# Altium PCB Basestation.PcbDoc
Units mm, origin at the board's own origin, x right, y up, seen from the top; angles counter-clockwise.
Board outline 171.58 x 100 mm, 2 copper layers (Top Layer, Bottom Layer); 74 components, 58 nets, 387 pads, 84 vias.
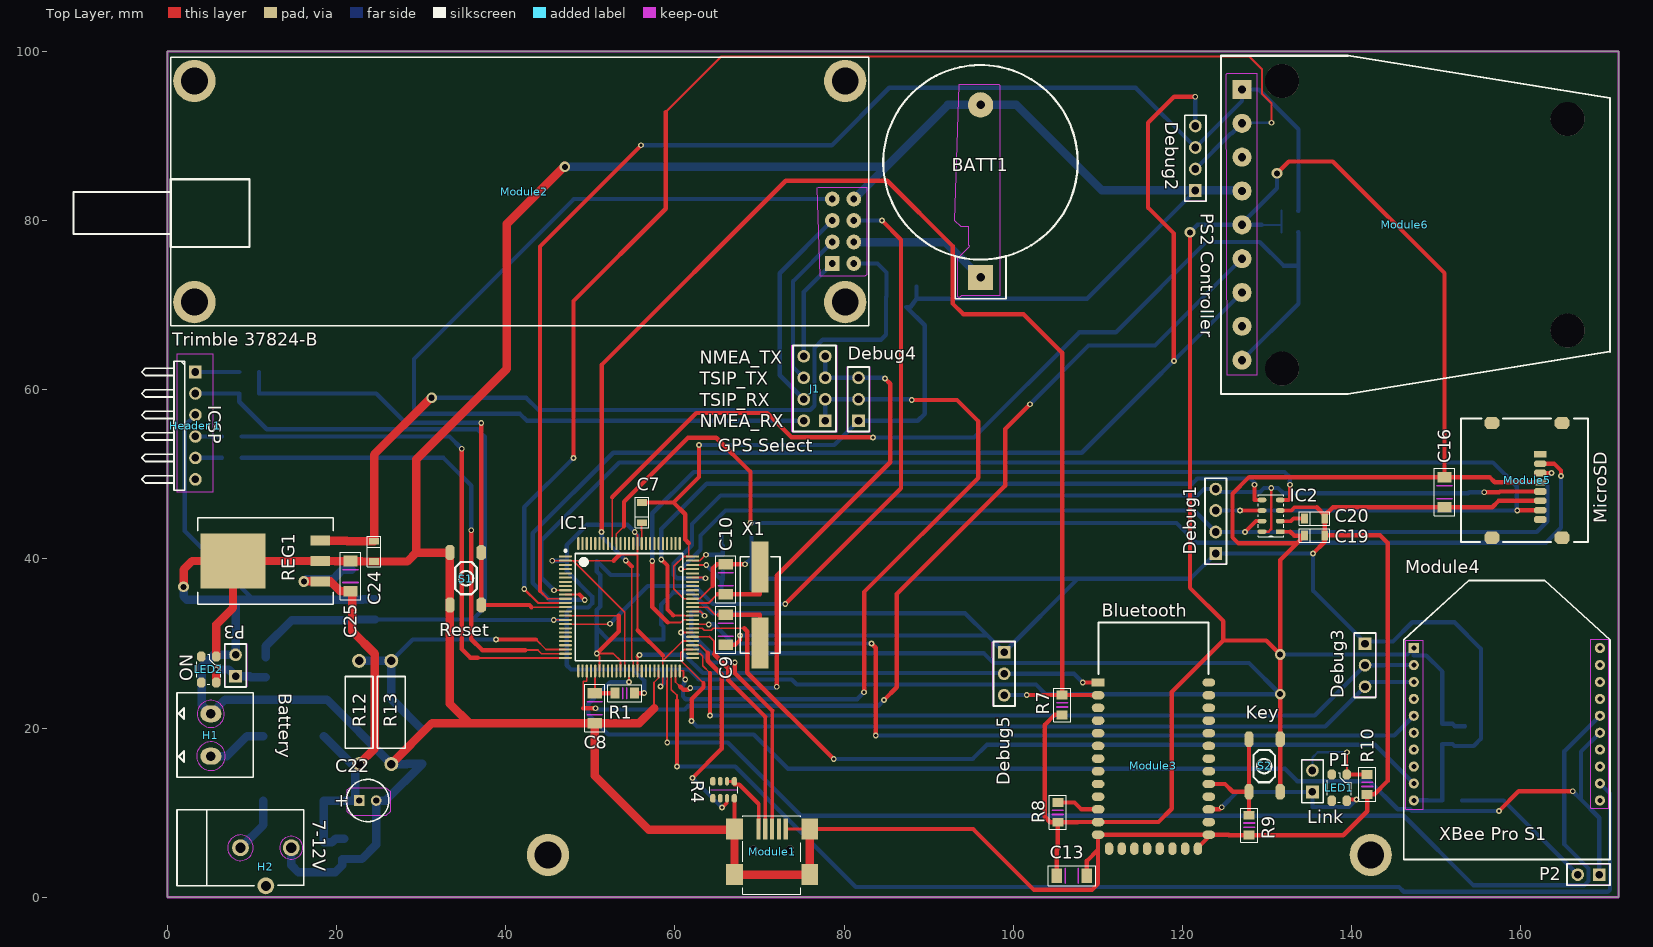
[diagram p0: Top Layer view]
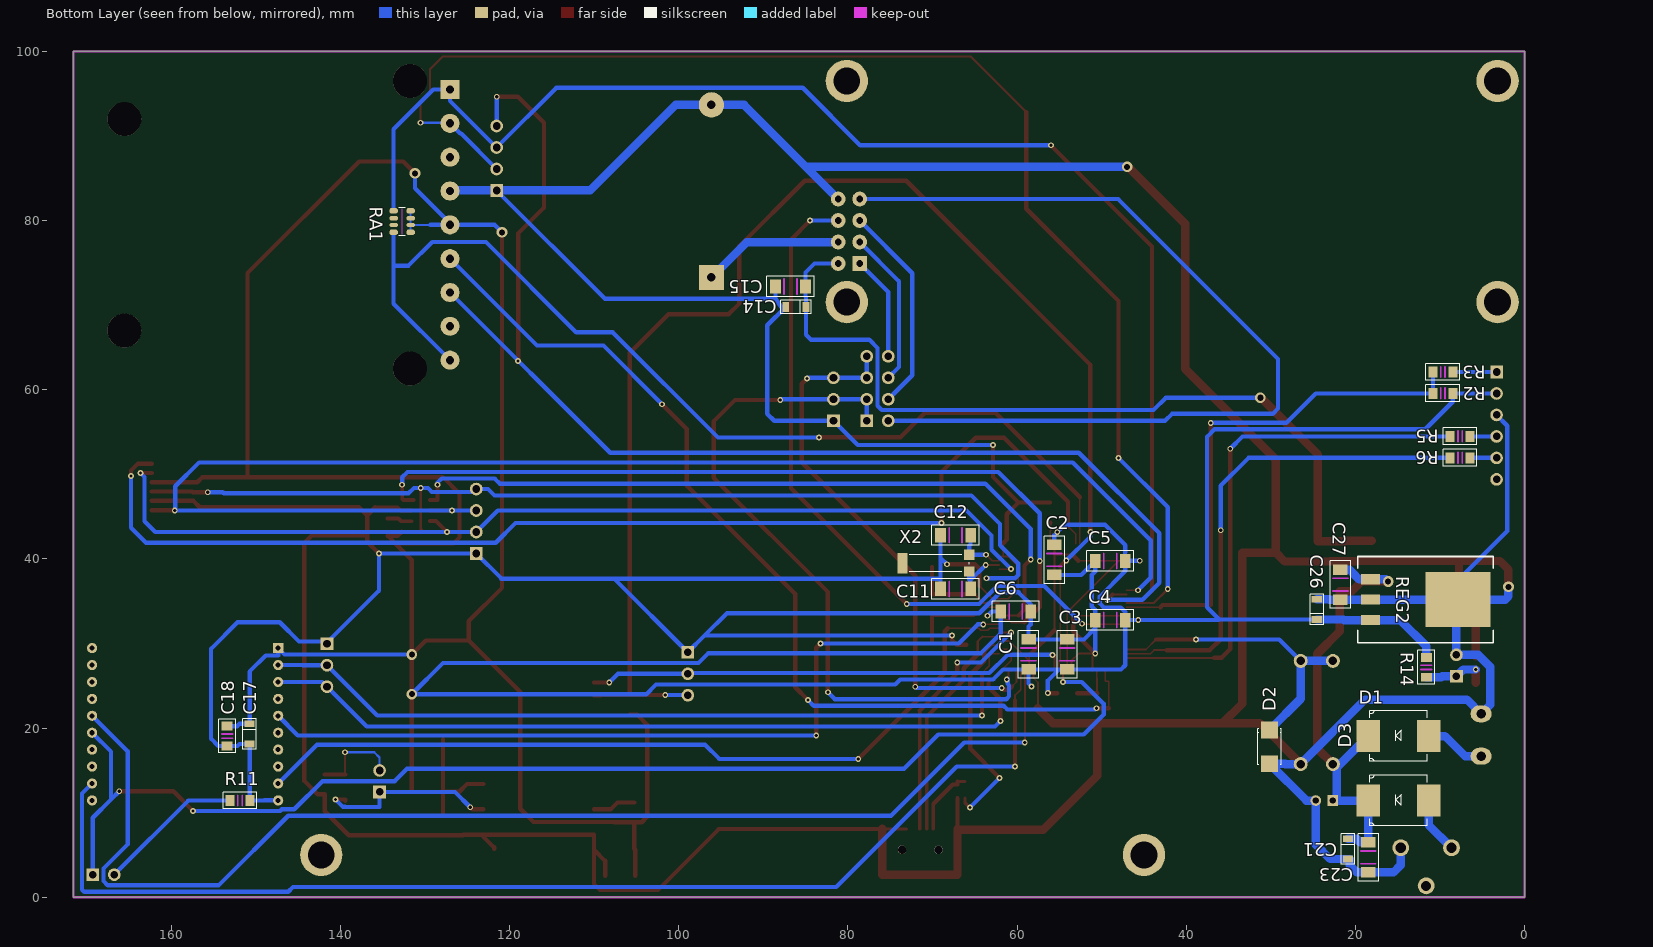
[diagram p1: Bottom Layer view, seen from below]

## Layer stack, top to bottom
Top Layer: signal copper 0.0356
Dielectric: dielectric 0.32, FR-4, Dk 4.8
Bottom Layer: signal copper 0.0356

## Board outline
0,0 0,100 171.577,100 171.577,0

## Design rules (kind name [scope] priority, off if disabled: settings)
Clearance Clearance_3 [IsVia vs (IsPad OR IsComponent OR IsComponentBody)] p1: gap=0.254
Clearance Clearance_2 [IsTrack] p2: gap=0.254
Clearance Clearance_1 [IsPad] p3: gap=0.203
Clearance [All] p4: gap=0.381
DiffPairsRouting [All] p1: maxlimit=0.254 minlimit=0.254 mostfreqgap=0.254 maxuncoupledlength=12.7
Height [All] p1: minheight=0 maxheight=100 prefheight=12.7
HoleSize [All] p1: absolutevalues=TRUE maxlimit=4 minlimit=0.381 maxpercent=80.000 minpercent=20.000
MinimumAnnularRing MinimumAnnularRing_1 [IsVia] p1: minimumring=0.127
MinimumAnnularRing [All] p2: minimumring=0.178
MinimumSolderMaskSliver [All] p1: minsoldermaskwidth=0.152
PolygonConnect [All] p1: connectstyle=Relief reliefconductorwidth=0.254 reliefentries=4 polygonreliefangle="90 Angle"
RoutingVias [All] p1: holewidth=0.381 width=0.686 viastyle="Through Hole" minholewidth=0.381 minwidth=0.686 maxholewidth=1 maxwidth=1.8
SMDNeckDown [All] p1: percent=80.000
SilkscreenOverComponentPads [All] p1: minsilkscreentomaskgap=0.254
SolderMaskExpansion [All] p1: expansion=0
ViasUnderSMD [All] p1: allowed=FALSE
Width [All] p1: maxlimit=2 minlimit=0.2 preferedwidth=0.508 minimp=50.000000 maximp=50.000000 favimp=50.000000
23 further rules are at their usual default settings.

## Classes and differential pairs
component class Power: C21 C22 C23 C24 C25 C26 C27 D1 D2 D3 H1 H2 LED2 P3 R12 R13 R14 REG1 REG2
component class "PIC Processor": C1 C2 C3 C4 C5 C6 C7 C8 C9 C10 C11 C12 IC1 R1 R2 R3 S1 X1 X2
component class Modules: BATT1 C14 C15 C16 C17 C18 C19 C20 IC2 LED1 Module2 Module3 Module4 Module5 Module6 P1 P2 R7 R8 R9 R10 R11 RA1 S2
component class Connectors: C13 Debug1 Debug2 Debug3 Debug4 Debug5 "Header 1" J1 Module1 R4 R5 R6
differential pair USB_PIC: +USB_PIC_P -USB_PIC_N

## Components (designator, comment, footprint, x,y, rotation, side; value= is the part's Value field where it differs from the comment)
BATT1 "Coin Cell Holder" "Coil Cell Holder" 96.139,73.279 r0 top
C1 "0.1uF SMD 1206" "SMD 1206" 58.642,28.702 r90 bottom
C2 "0.1uF SMD 1206" "SMD 1206" 55.594,39.878 r270 bottom
C3 "0.1uF SMD 1206" "SMD 1206" 54.07,28.702 r90 bottom
C4 "0.1uF SMD 1206" "SMD 1206" 48.99,32.766 r0 bottom
C5 "0.1uF SMD 1206" "SMD 1206" 48.99,39.751 r0 bottom
C6 "0.1uF SMD 1206" "SMD 1206" 60.166,33.782 r180 bottom
C7 "10uF Low-ESR Tantalum CaseA" "Capacitor - Tantalum Case A" 56.102,45.466 r90 top
C8 "0.1uF SMD 1206" "SMD 1206" 50.514,22.352 r270 top
C9 "22pF SMD 1206" "SMD 1206" 66.008,31.623 r90 top
C10 "22pF SMD 1206" "SMD 1206" 66.008,37.592 r270 top
C11 "22pF SMD 1206" "SMD 1206" 67.278,36.449 r180 bottom
C12 "22pF SMD 1206" "SMD 1206" 67.278,42.799 r180 bottom
C13 "0.1uF SMD 1206" "SMD 1206" 106.934,2.54 r180 top
C14 "10uF Low-ESR Tantalum CaseA" "Capacitor - Tantalum Case A" 86.16,69.796 r0 bottom
C15 "0.1uF SMD 1206" "SMD 1206" 86.795,72.209 r0 bottom
C16 "0.1uF SMD 1206" "SMD 1206" 150.997,47.892 r90 top
C17 "1.0uF Low-ESR Tantalum CaseA" "Capacitor - Tantalum Case A" 150.749,19.304 r270 bottom
C18 "8.2pF SMD 0805" "SMD 0805" 153.416,19.05 r90 bottom
C19 "1.0uF Low-ESR Tantalum CaseA" "Capacitor - Tantalum Case A" 135.65,42.755 r0 top
C20 "1.0uF Low-ESR Tantalum CaseA" "Capacitor - Tantalum Case A" 135.65,44.787 r0 top
C21 "1.0uF Low-ESR Tantalum CaseA" "Capacitor - Tantalum Case A" 20.879,5.715 r270 bottom
C22 "10uF Electrolitic" CAPPR2-5x5 23.673,11.43 r0 top
C23 "0.1uF SMD 1206" "SMD 1206" 18.466,4.699 r90 bottom
C24 "10uF Low-ESR Tantalum CaseA" "Capacitor - Tantalum Case A" 24.435,40.894 r270 top
C25 "0.1uF SMD 1206" "SMD 1206" 21.641,37.973 r90 top
C26 "10uF Low-ESR Tantalum CaseA" "Capacitor - Tantalum Case A" 24.562,34.036 r90 bottom
C27 "0.1uF SMD 1206" "SMD 1206" 21.768,36.957 r90 bottom
D1 "MBRS540T3G" MBRS540T3G 14.91,19.05 r180 bottom
D2 "1SMAS913BT3G" 1SMA5913BT3G 30.15,17.78 r270 bottom
D3 "MBRS540T3G" MBRS540T3G 14.91,11.43 r180 bottom
Debug1 "SPI1" HDR1X4 123.952,40.64 r90 top
Debug2 "SPI1" HDR1X4 121.539,83.566 r90 top
Debug3 "UART1" HDR1X3 141.605,29.972 r270 top
Debug4 "UART2" HDR1X3 81.715,56.334 r90 top
Debug5 "UART5" HDR1X3 98.933,28.956 r270 top
H1 "Battery" "PC Wire Connector" 5.131,19.177 r90 top
H2 "7-12V" "DC Power Jack" 1.131,5.842 r180 top
"Header 1" "ICSP" HDR1X6H 3.302,62.103 r270 top
IC1 "PIC32MX795F512L-80I/PT" TQFP-PF100_L 54.578,34.29 r0 top
IC2 "MPL115A1" MPL115A1 130.497,45.095 r180 top
J1 "GPS Select" HDR2X4 77.778,56.334 r90 top
LED1 "Link" "PLCC-4 LED" 138.557,12.954 r270 top
LED2 "ON" "PLCC-4 LED" 4.877,26.924 r270 top
Module1 "Mini-USB" "Mini B USB Connector" 68.046,0.367 r0 top
Module2 "Trimble 37824-B" "Trimble 37824-B" 3.175,70.358 r0 top
Module3 "Bluetooth" "BT0417C Bluetooth Module" 116.586,16.383 r0 top
Module4 "XBee Pro S1" "XBee Pro S1 Wireless Module" 158.369,20.447 r0 top
Module5 "MicroSD" "MicroSD Card Slot" 152.956,42.504 r90 top
Module6 "PS2 Controller" "PS2 Wireless Module" 146.304,79.502 r180 top
P1 "Header 2" HDR1X2 135.382,12.446 r90 top
P2 "Header 2" HDR1X2 169.291,2.667 r180 top
P3 "Header 2" HDR1X2 8.052,26.117 r90 top
R1 "10 SMD 0805" "SMD 0805" 54.07,24.13 r0 top
R2 "10K SMD 0805" "SMD 0805" 9.652,59.563 r180 bottom
R3 "100 SMD 0805" "SMD 0805" 9.652,62.103 r180 bottom
R4 "Value: 10K SMD Resistor Array" "Resistor Array YC164" 65.76,12.686 r270 top
R5 "100 SMD 0805" "SMD 0805" 7.62,54.483 r0 bottom
R6 "100 SMD 0805" "SMD 0805" 7.62,51.943 r0 bottom
R7 "10K SMD 0805" "SMD 0805" 105.791,22.733 r270 top
R8 "10K SMD 0805" "SMD 0805" 105.283,10.033 r90 top
R9 "10K SMD 0805" "SMD 0805" 127.889,8.509 r90 top
R10 "1K SMD 0805" "SMD 0805" 141.859,13.335 r270 top
R11 "1K SMD 0805" "SMD 0805" 151.892,11.43 r180 bottom
R12 "3.9K Radial" RES12.2-8.5X3.3 22.657,21.844 r270 top
R13 "1.3K Radial" RES12.2-8.5X3.3 26.467,21.844 r90 top
R14 "1K SMD 0805" "SMD 0805" 11.608,27.178 r270 bottom
RA1 "Value: 10K SMD Resistor Array" "Resistor Array YC164" 132.715,79.883 r180 bottom
REG1 "MIC29300-5.0WU" "TO-263 D2PACK" 18.085,39.751 r180 top
REG2 "MIC29300-3.3WU" "TO-263 D2PACK" 18.212,35.179 r180 bottom
S1 "Reset" "SMD Tactile Switch" 33.401,34.544 r90 top
S2 "Key" "SMD Tactile Switch" 131.572,18.669 r270 top
X1 "XT9M20ANA8M" "XT9M20ANA8M - 8MHz Capacitor" 70.072,34.544 r270 top
X2 "SSP-T6-7PF-20PPM" "32.768KHz Crystal" 65.659,39.497 r90 bottom

## Footprints (in the part's own frame and the unit in brackets; to place one, negate y for a bottom-side part, rotate by r counter-clockwise, add the part's x,y. Pads: shape width x height; smd on the part's side, far side on the other; paste and mask are expansions set on the pad)
1SMA5913BT3G [mm]
  rect 2x2 smd: A(2,0) K(-2,0)
  silkscreen extent -2.16,-1.4 2.14,1.4
"32.768KHz Crystal" [mm]
  rect 1.2x1.2 smd: 1(-1,0) 2(1,0)
  rect 2.4x1.2 smd: NC(0,7.9)
  silkscreen extent -1,0 1,7.11
"BT0417C Bluetooth Module" [mm]
  rect 1.5x1 smd: 1(-6.55,9)
  oval 1.5x1 smd: 2(-6.55,7.5) 3(-6.55,6) 4(-6.55,4.5) 5(-6.55,3) 6(-6.55,1.5) 7(-6.55,0) 8(-6.55,-1.5) 9(-6.55,-3) 10(-6.55,-4.5) 11(-6.55,-6) 12(-6.55,-7.5) 13(-6.55,-9) 22(6.55,-9) 23(6.55,-7.5) 24(6.55,-6) 25(6.55,-4.5) 26(6.55,-3) 27(6.55,-1.5) 28(6.55,0) 29(6.55,1.5) 30(6.55,3) 31(6.55,4.5) 32(6.55,6) 33(6.55,7.5) 34(6.55,9)
  oval 1x1.5 smd: 14(-5.25,-10.65) 15(-3.75,-10.65) 16(-2.25,-10.65) 17(-0.75,-10.65) 18(0.75,-10.65) 19(2.25,-10.65) 20(3.75,-10.65) 21(5.25,-10.65)
  silkscreen extent -6.5,10 6.5,16.1
"Capacitor - Tantalum Case A" [mm]
  rect 0.8x1.2 smd: 1(-1.2,0) 2(1.2,0)
  silkscreen extent -1.8,-0.8 1.8,0.8
CAPPR2-5x5 [mm] "Capacitor, Electrolytic, Radial; Body 5 x 5 mm (Dia.xH typ); Pin Spacing 2 mm (typ)"
  rect 1.25x1.25 hole 0.75: 1(-1,0)
  round 1.25 hole 0.75: 2(1,0)
  silkscreen extent -2.5,-2.5 2.5,2.5
"Coil Cell Holder" [mm]
  round 3 hole 1: NEG(0,20.4)
  rect 3x3 hole 1: POS(0,0)
  silkscreen extent -11.5,-2.5 11.5,25.12, body extent -11.51,-2.5 11.51,25.13, height 8.5
"DC Power Jack" [mm]
  round 2 hole 1.2: IN(-7.5,0) NC(-10.5,4.5) OUT(-13.5,0)
  Top Layer keep-out circle w0.1: c-7.5,0 r1.517
  Top Layer keep-out circle w0.1: c-13.5,0 r1.359
  silkscreen extent -15,-4.5 0,4.5
HDR1X2 [mm] "Connector; Header; 2 Position"
  rect 1.5x1.5 hole 0.9: 1(0,0)
  round 1.5 hole 0.9: 2(2.54,0)
  silkscreen extent -1.27,-1.27 3.81,1.27
HDR1X3 [mm] "Connector; Header; 3 Position"
  rect 1.5x1.5 hole 0.9: 1(0,0)
  round 1.5 hole 0.9: 2(2.54,0) 3(5.08,0)
  silkscreen extent -1.27,-1.27 6.35,1.27
HDR1X4 [mm] "Connector; Header; 4 Position"
  rect 1.5x1.5 hole 0.9: 1(0,0)
  round 1.5 hole 0.9: 2(2.54,0) 3(5.08,0) 4(7.62,0)
  silkscreen extent -1.27,-1.27 8.89,1.27
HDR1X6H [mm] "Connector; Header; 6 Position; Right Angle"
  rect 1.5x1.5 hole 0.9: 1(0,0)
  round 1.5 hole 0.9: 2(2.54,0) 3(5.08,0) 4(7.62,0) 5(10.16,0) 6(12.7,0)
  silkscreen extent -1.27,-6.35 13.97,-1.27
HDR2X4 [mm] "Connector; Header; 4x2 Position"
  rect 1.5x1.5 hole 0.9: 1(0,0)
  round 1.5 hole 0.9: 2(0,2.54) 3(2.54,0) 4(2.54,2.54) 5(5.08,0) 6(5.08,2.54) 7(7.62,0) 8(7.62,2.54)
  silkscreen extent -1.27,-1.27 8.89,3.81
MBRS540T3G [mil]
  rect 110x150 smd: A(140.49,0) K(-140.47,0)
  silkscreen extent -134,-118 134,118
"MicroSD Card Slot" [mm]
  rect 0.8x1.5 smd: 1(9.859,-9.35)
  oct 0.8x1.5 smd: 2(8.759,-9.35) 3(7.659,-9.35) 4(6.559,-9.35) 5(5.459,-9.35) 6(4.359,-9.35) 7(3.259,-9.35) 8(2.159,-9.35)
  oct 1.45x1.8 smd: SHLD(0,-3.65) SHLD(0,-11.95) SHLD(13.56,-11.95) SHLD(13.56,-3.65)
  silkscreen extent -0.51,-15 14.1,0
"Mini B USB Connector" [mm]
  rect 2x2.5 smd: 1(-1,2.3) 1(-1,7.7) 1(7.9,2.3) 1(7.9,7.7)
  rect 0.5x2.5 smd: 1(5.05,7.7) 2(4.25,7.7) 3(3.45,7.7) 4(2.65,7.7) 5(1.85,7.7)
  round 1 hole 1: NC(1.25,5.25) NC(5.56,5.25)
  silkscreen extent 0,0 6.86,9.27
MPL115A1 [mm]
  rect 1.05x0.55 smd: 1(-1.075,1.875)
  oval 1.05x0.55 smd: 2(-1.075,0.625) 3(-1.075,-0.625) 4(-1.075,-1.875) 5(1.075,-1.875) 6(1.075,-0.625) 7(1.075,0.625) 8(1.075,1.875)
  silkscreen extent -1.52,-2.5 1.52,2.5
"PC Wire Connector" [mm]
  oval 2x2.5 hole 1.1: L(-2.5,0) R(2.5,0)
  Top Layer keep-out circle w0.1: c2.5,0 r1.611
  Top Layer keep-out circle w0.1: c-2.5,0 r1.691
  silkscreen extent -5,-5 5,4
"PLCC-4 LED" [mm]
  oct 1.2x1 smd: 1(-1.55,0.9) 2(1.55,0.9) 3(-1.55,-0.9) 4(1.55,-0.9)
  silkscreen extent -1.78,-1.4 1.75,1.4
"PS2 Wireless Module" [mm]
  rect 2.25x2.25 hole 1: 1(19.25,-16)
  round 2.25 hole 1: 2(19.25,-12) 3(19.25,-8) 4(19.25,-4) 5(19.25,0) 6(19.25,4) 7(19.25,8) 8(19.25,12) 9(19.25,16)
  round 4 hole 4 mask+0: NC(-19.25,12.5) NC(-19.25,-12.5) NC(14.5,17) NC(14.5,-17)
  silkscreen extent -24.25,-20 21.75,20, body extent -24.25,-20 21.75,20, height 6
RES12.2-8.5X3.3 [mm] "Resistor, Axial; Body 8.5 x 3.3 mm (LxDia. max), Lead Dia. 0.7 mm (max)"
  round 1.65 hole 1: 1(-6.1,0) 2(6.1,0)
  silkscreen extent -4.25,-1.65 4.25,1.65
"Resistor Array YC164" [mm]
  oct 1x0.65 smd: 1(-1,1.275) 4(-1,-1.275) 5(1,-1.275) 8(1,1.275)
  oct 1x0.5 smd: 2(-1,0.4) 3(-1,-0.4) 6(1,-0.4) 7(1,0.4)
  Top Layer keep-out lines w0.1: 0,-1.524 0,1.524
  Mechanical 1 keep-out lines w0.1: 1.905,-1.905 1.905,1.905 -1.905,1.905 -1.905,-1.905 1.905,-1.905
  silkscreen extent -0.38,-1.65 0.38,1.65
"SMD 0805" [mm]
  rect 1.05x1.3 smd: 1(-1.175,0) 2(1.175,0)
  Top Layer keep-out lines w0.2: -0.254,-0.635 -0.254,0.635 ; 0.254,-0.635 0.254,0.635
  silkscreen extent -2,-1 2,1
"SMD 1206" [mm]
  rect 1.25x1.7 smd: 1(-1.775,0) 2(1.775,0)
  Top Layer keep-out lines w0.2: -0.762,-0.889 -0.762,0.889 ; 0.762,-0.889 0.762,0.889
  silkscreen extent -2.8,-1.2 2.8,1.2
"SMD Tactile Switch" [mm]
  oct 1.8x1.1 smd: 1(0,0) 1(6.2,0) 2(0,-3.7) 2(6.2,-3.7)
  Mechanical 1 keep-out lines w0.1: -1.651,1.27 7.62,1.27 7.62,-4.953 -1.651,-4.953 -1.651,1.27
  silkscreen extent 1.27,-3.17 5.08,-0.63
"TO-263 D2PACK" [mm]
  rect 2.3x1.19 smd: 1(0,2.413) 2(0,0) 3(0,-2.413)
  rect 7.696x6.502 smd: 2(10.338,0)
  silkscreen extent -1.5,-5.1 14.5,5.1
TQFP-PF100_L [mm] "Thin QFP, 100-Leads, Body 14x14mm, Pitch 0.5mm, IPC High Density"
  oval 1.55x0.25 smd: 1(-7.525,6) 2(-7.525,5.5) 3(-7.525,5) 4(-7.525,4.5) 5(-7.525,4) 6(-7.525,3.5) 7(-7.525,3) 8(-7.525,2.5) 9(-7.525,2) 10(-7.525,1.5) 11(-7.525,1) 12(-7.525,0.5) 13(-7.525,0) 14(-7.525,-0.5) 15(-7.525,-1) 16(-7.525,-1.5) 17(-7.525,-2) 18(-7.525,-2.5) 19(-7.525,-3) 20(-7.525,-3.5) 21(-7.525,-4) 22(-7.525,-4.5) 23(-7.525,-5) 24(-7.525,-5.5) 25(-7.525,-6) 51(7.525,-6) 52(7.525,-5.5) 53(7.525,-5) 54(7.525,-4.5) 55(7.525,-4) 56(7.525,-3.5) 57(7.525,-3) 58(7.525,-2.5) 59(7.525,-2) 60(7.525,-1.5) 61(7.525,-1) 62(7.525,-0.5) 63(7.525,0) 64(7.525,0.5) 65(7.525,1) 66(7.525,1.5) 67(7.525,2) 68(7.525,2.5) 69(7.525,3) 70(7.525,3.5) 71(7.525,4) 72(7.525,4.5) 73(7.525,5) 74(7.525,5.5) 75(7.525,6)
  oval 0.25x1.55 smd: 26(-6,-7.525) 27(-5.5,-7.525) 28(-5,-7.525) 29(-4.5,-7.525) 30(-4,-7.525) 31(-3.5,-7.525) 32(-3,-7.525) 33(-2.5,-7.525) 34(-2,-7.525) 35(-1.5,-7.525) 36(-1,-7.525) 37(-0.5,-7.525) 38(0,-7.525) 39(0.5,-7.525) 40(1,-7.525) 41(1.5,-7.525) 42(2,-7.525) 43(2.5,-7.525) 44(3,-7.525) 45(3.5,-7.525) 46(4,-7.525) 47(4.5,-7.525) 48(5,-7.525) 49(5.5,-7.525) 50(6,-7.525) 76(6,7.525) 77(5.5,7.525) 78(5,7.525) 79(4.5,7.525) 80(4,7.525) 81(3.5,7.525) 82(3,7.525) 83(2.5,7.525) 84(2,7.525) 85(1.5,7.525) 86(1,7.525) 87(0.5,7.525) 88(0,7.525) 89(-0.5,7.525) 90(-1,7.525) 91(-1.5,7.525) 92(-2,7.525) 93(-2.5,7.525) 94(-3,7.525) 95(-3.5,7.525) 96(-4,7.525) 97(-4.5,7.525) 98(-5,7.525) 99(-5.5,7.525) 100(-6,7.525)
  silkscreen extent -7.65,-6.35 6.35,6.8, body extent -7,-7 7,7, height 1.2
"Trimble 37824-B" [mm]
  rect 1.75x1.75 hole 0.8: 1(75.44,4.57)
  round 1.75 hole 0.8: 2(77.98,4.57) 3(75.44,7.11) 4(77.98,7.11) 5(75.44,9.65) 6(77.98,9.65) 7(75.44,12.19) 8(77.98,12.19)
  round 5 hole 3.175: NC(0,0) NC(0,26.16) NC(76.962,0) NC(76.962,26.16)
  silkscreen extent -14.29,-2.8 79.76,28.95, body extent -2.67,-2.67 79.63,28.83, height 11.12
"XBee Pro S1 Wireless Module" [mm]
  rect 1.2x1.2 hole 0.6: 1(-11,9)
  round 1.2 hole 0.6: 2(-11,7) 3(-11,5) 4(-11,3) 5(-11,1) 6(-11,-1) 7(-11,-3) 8(-11,-5) 9(-11,-7) 10(-11,-9) 11(11,-9) 12(11,-7) 13(11,-5) 14(11,-3) 15(11,-1) 16(11,1) 17(11,3) 18(11,5) 19(11,7) 20(11,9)
  Top Layer keep-out lines w0.1: -11.938,-10.033 -11.938,9.906 -9.906,9.906 -9.906,-10.033 -11.938,-10.033 ; 9.906,-9.906 9.906,10.033 12.065,10.033 12.065,-9.906 9.906,-9.906
  silkscreen extent -12.19,-16 12.19,17
"XT9M20ANA8M - 8MHz Capacitor" [mm]
  rect 6x2 smd: 1(-4.5,0) 2(4.5,0)
  silkscreen extent -5.7,-2.35 5.7,2.35

## Part data
BATT1: "Coin Cell Battery Holder"
C1 C2 C3 C4 C5 C6 C8 C9 C10 C11 C12 C13 C15 C16 C18 C23 C25 C27: library part Cap, "Capacitor"
C7 C14 C17 C19 C20 C21 C24 C26: library part SMD_Cap_Tantalum, "Tantalum Capacitor - Case A"
C22: library part "Cap Pol1", "Polarized Capacitor (Radial)"
D1 D3: "40V 5A Scottky Diode"
D2: "3.3V 1.5W Zener Diode"
Debug1 Debug2: library part "Header 4", "Header, 4-Pin"
Debug3 Debug4 Debug5: library part "Header 3", "Header, 3-Pin"
H1: library part "PC Wire Connector"
H2: library part "DC Jack", "DC Power Jack"
"Header 1": library part "Header 6", "Header, 6-Pin"
IC1: "High Performance 80 MHz MIPS-Based 32-Bit Flash Microcontroller with USB, CAN and Ethernet, 512KB Program Memory, 100-pin TQFP, Industrial Temperature"
IC2: "Miniature SPI Digital Barometer"
J1: library part "Header 4X2", "Header, 4-Pin, Dual row"
LED1: library part "SMD LED"
LED2: library part "SMD LED", "Surface Mount Chip LED"
Module1: library part "Mini USB Connector"
Module2: "Trimble 37824-B GPS Module"
Module3: library part "Bluetooth SMD Module", "Bluetooth SMD Serial Module"
Module4: "XBee Pro S1 60mW Wireless Module"
Module5: library part "MicroSD Socket", "MicroSD SPI Interface"
Module6: library part "PS2 Wireless Controller", "PS2 Wireless Controller"
P1 P2 P3: "Header, 2-Pin"
R1 R2 R3 R5 R6 R7 R8 R9 R10 R11 R12 R13 R14: library part Res2, "Resistor"
R4 RA1: library part "SMD Resistor Array", "4-Count Resistor Array"
REG1 REG2: "3.0A LDO Fixed Volt.(ROHS Compliant)"
S1 S2: library part "SMD Tactile Switch", "SMD Tactile Switch"
X1: "8MHz SMD Crystal"
X2: "32.768KHz 7pF SMD Crystal"

## Free pads (board coordinates)
  round 5 hole 3.175: 0(142.282,5) NC(45,5)

## Via types
v1: diameter 0.686, hole 0.381, Top Layer to Bottom Layer, 76 vias
v2: diameter 1.27, hole 0.711, Top Layer to Bottom Layer, 8 vias

## Nets (pads, with @x,y where several pads share a name; then routed paths per layer and width w, separated by ;. In a path a pad name is that pad's centre, name@x,y a point inside that pad or via, vN(x,y) a via of type N, cw(c..) or ccw(c..) an arc to the next point about the centre after c; other vN are vias at no path point)
+3.3V: "Header 1.2" C1.1 C2.1 C3.1 C4.1 C5.1 C6.1 C13.2 C16.2 C17.1 C18.2 C19.1 C26.1 IC1.2 IC1.16 IC1.37 IC1.46 IC1.55 IC1.62 IC1.86 IC2.1 Module3.12 Module4.1 Module5.4 Module6.5 R1.2 R2.2 R7.2 R8.1 R14.1 RA1.5 RA1.6 RA1.7 RA1.8 REG2.3 S2.1 | length 664.1
  Top Layer w0.2: v1(45.505,39.79) IC1.2 47.995,39.79 ; v1(45.669,32.766) 45.693,32.79 IC1.16 ; 52.756,39.79 47.995,39.79 ; 53.476,40.51 55.457,40.51 55.578,40.631 ; IC1.37 54.078,33.707 47.995,39.79 ; v1(55.245,43.18) 55.575,42.85 55.575,41.818 IC1.86 55.578,40.631 ; 55.578,31.569 55.578,40.631 ; v1(58.293,24.924) 58.578,25.209 IC1.46 58.578,27.94 ; 58.578,28.569 58.578,27.94 ; IC1.55 60.928,30.29 58.578,27.94 ; IC1.62 62.984,33.79 v1(63.5,33.274)
  Top Layer w0.4: IC2.1 132.766,43.22
  Top Layer w0.508: 52.756,39.79 53.476,40.51 ; R1.2 v1(56.363,24.13) ; 55.578,31.569 58.578,28.569 ; C13.2 105.159,5.613 105.283,5.737 R8.1 ; R7.2 104.902,21.558 103.721,20.377 103.721,9.525 104.388,8.858 R8.1 ; v2(120.904,78.613) 120.904,36.576 124.841,32.639 124.841,30.353 ; v2(131.191,85.598) 132.588,86.995 137.795,86.995 150.997,73.793 C16.2 ; S2.1@131.572,12.469 131.572,18.669 v2(131.572,24.003) v2(131.572,28.702) ; 132.766,43.22 133.231,42.755 C19.1 133.529,41.834 ; Module5.4 156.941,49.063 156.337,49.667 C16.2 ; R8.1 107.645,8.858 107.67,8.883 Module3.12 117.17,8.883 118.745,10.458 118.745,24.257 124.841,30.353 ; 124.841,30.353 129.921,30.353 v2(131.572,28.702) ; v2(131.572,28.702) 131.572,39.877 133.529,41.834 ; 133.529,41.834 126.644,41.834 125.933,42.545 125.933,47.701 127.899,49.667 C16.2
  Bottom Layer w0.254: 129.381,79.483 RA1.6 ; RA1.5 RA1.6 ; RA1.8 RA1.7 RA1.6
  Bottom Layer w0.508: 3.302,59.563 R2.2 8.477,58.579 11.735,55.321 36.652,55.321 37.541,54.432 37.541,34.29 36.087,32.836 C26.1 36.157,32.766 v1(45.669,32.766) C4.1 ; v1(45.505,39.79) C5.1@47.244,39.79 ; C2.1 55.594,42.831 v1(55.245,43.18) 54.394,44.031 49.615,44.031 47.215,41.631 C5.1@47.244,39.79 ; v1(56.363,24.13) 56.363,25.619 55.054,26.924 ; v1(58.293,24.924) 58.642,25.273 C1.1 ; v1(63.5,33.274) 62.992,33.782 C6.1 61.941,31.18 64.262,28.859 96.502,28.859 97.675,27.686 127.889,27.686 v2(131.572,24.003) 103.835,24.003 102.692,25.146 74.409,25.146 73.812,25.743 62.835,25.743 61.651,26.927 C1.1 ; v2(120.904,78.613) 121.793,79.502 Module6.5 129.362,79.502 129.381,79.483 ; Module6.5@127.054,79.683 131.191,83.82 v2(131.191,85.598) ; v2(131.572,28.702) 146.624,28.702 Module4.1 147.369,28.575 148.844,28.575 150.749,26.67 C17.1 151.943,20.504 152.222,20.225 C18.2 ; C4.1 47.215,33.728 47.752,34.265 49.759,34.265 50.216,34.722 50.216,35.56 47.215,38.561 47.243,39.75 C5.1@47.244,39.79 ; C4.1 47.215,27.436 47.724,26.927 C3.1 54.07,26.924 55.054,26.924 ; 55.054,26.924 56.36,26.924 56.363,26.927 C1.1
  Bottom Layer w1: R14.1 11.608,29.667 14.707,32.766 REG2.3 21.336,32.766 21.406,32.836 C26.1
+5.0V: C14.1 C15.1 C24.1 Module2.2 REG1.3 | length 100
  Top Layer w1: REG1.3 21.209,42.164 21.279,42.094 C24.1 24.435,52.324 31.166,59.055 v2(31.242,59.055)
  Bottom Layer w0.508: v2@31.166,59.055 42.412,59.055 43.859,57.607 76.01,57.607 76.505,58.102 76.505,64.948 77.47,65.913 84.379,65.913 84.96,66.494 C14.1 84.96,70.968 85.02,71.028 C15.1 85.02,73.855 83.947,74.928 Module2.2
BAROMETER_/CS: IC1.61 IC2.5 | length 88.9
  Top Layer w0.2: 59.819,33.317 61.137,33.317 61.164,33.29 IC1.61
  Top Layer w0.44: v1(128.524,48.768) 128.524,46.97 IC2.5
  Top Layer w0.508: v1(58.395,39.929) 59.118,39.205 59.118,34.018 59.819,33.317
  Bottom Layer w0.508: v1(58.395,39.929) 58.395,43.536 63.754,48.895 121.158,48.895 121.781,49.518 128.028,49.518 128.524,49.022 v1(128.524,48.768)
BAROMETER_/SHDN: IC1.60 IC2.4 | length 98.4
  Top Layer w0.2: 59.157,32.487 60.706,32.487 61.009,32.79 IC1.60
  Top Layer w0.44: IC2.4@131.343,46.97 IC2.4 132.568,46.97 132.715,47.117 v1(132.715,48.768)
  Top Layer w0.508: v1(57.328,39.751) 57.328,34.315 59.157,32.487
  Bottom Layer w0.508: v1(57.328,39.751) 57.328,45.39 62.218,50.28 132.092,50.28 132.715,49.657 v1(132.715,48.768)
BLUETOOTH_RX: Debug5.3 IC1.39 Module3.2 R7.1 | length 165.2
  Top Layer w0.2: 54.889,39.091 54.889,28.083 55.078,27.894 IC1.39
  Top Layer w0.508: v1(51.333,43.18) 51.333,62.941 73.101,84.709 85.115,84.709 92.837,76.987 92.837,70.206 94.107,68.936 101.219,68.936 105.791,64.364 R7.1 ; v1(54.178,39.802) 54.889,39.091 ; v1(101.6,23.908) R7.1 ; Module3.2 109.269,23.883 109.244,23.908 R7.1
  Bottom Layer w0.508: v1(51.333,43.18) 51.333,42.647 v1(54.178,39.802) ; Debug5.3 98.965,23.908 v1(101.6,23.908)
BLUETOOTH_TX: Debug5.2 IC1.40 Module3.1 | length 57.5
  Top Layer w0.2: IC1.40 v1@55.578,28.425
  Top Layer w0.508: v1@55.578,28.425 v1(55.804,28.651) ; v1(108.229,25.383) Module3.1
  Bottom Layer w0.508: v1(55.804,28.651) 61.142,28.651 63.288,26.505 Debug5.2@98.933,26.505 ; Debug5.2 107.196,26.416 v1(108.229,25.383)
GND: "Header 1.3" BATT1.NEG C1.2 C2.2 C3.2 C4.2 C5.2 C6.2 C7.2 C8.2 C9.1 C10.1 C11.1 C12.1 C13.1 C14.2 C15.2 C16.1 C17.2 C18.1 C19.2 C20.2 C21.2 C22.2 C23.1 C24.2 C25.2 C26.2 C27.1 D2.A Debug1.1 Debug2.1 Debug3.1 Debug4.1 Debug5.1 H1.R H2.OUT IC1.15 IC1.31 IC1.36 IC1.45 IC1.65 IC1.75 IC2.3 LED2.1 Module1.1 Module2.8 Module3.13 Module3.21 Module3.22 Module4.10 Module5.6 Module6.4 P3.2 R4.8 R9.1 R10.2 R11.2 R13.1 REG1.2 REG2.2 S1.1 | length 971.3
  Top Layer w0.2: IC1.15 53.351,33.29 ; IC1.31 51.078,28.505 v1(50.765,28.818) 52.716,28.818 53.578,27.956 IC1.36 ; 57.531,22.325 57.531,25.391 58.057,25.917 58.057,26.744 IC1.45 ; 61.646,41.859 IC1.75@61.646,40.29 ; IC1.75 IC1.75@61.646,40.29 ; 64.491,36.83 62.951,35.29 IC1.65 61.052,35.29 59.88,36.462 59.88,39.111 61.059,40.29 IC1.75@61.646,40.29
  Top Layer w0.4: Module1.1@73.096,8.067 Module1.1@75.946,8.067
  Top Layer w0.44: IC2.3 132.893,45.72 133.274,46.101 135.89,46.101
  Top Layer w0.508: v1(50.765,28.818) 53.365,31.418 53.365,33.275 53.351,33.29 ; C7.2 59.817,46.666 ; 61.646,41.859 61.214,42.291 61.214,45.269 59.817,46.666 ; v1(62.84,53.467) 62.84,49.689 59.817,46.666 ; 64.491,36.83 64.491,38.887 64.97,39.367 C10.1 v1(68.301,39.367) ; C9.1 67.12,29.848 67.691,30.419 v1(67.691,30.937) ; R4.8 67.035,9.866 Module1.1@67.046,8.067 ; Module1.1@75.946,8.067 95.26,8.067 102.464,0.864 109.322,0.864 110.036,1.578 110.036,5.62 ; C13.1 108.709,4.293 110.036,5.62 ; Module3.21 121.836,5.893 123.136,7.193 Module3.22 ; v1(135.458,40.64) 136.85,42.032 C19.2 C19.2@136.85,42.799 ; 135.89,46.101 136.85,45.141 C20.2 ; Module5.6 157.388,46.863 156.642,46.117 C16.1 137.811,46.117 136.85,45.156 C20.2 ; 110.036,5.62 Module3.13 Module3.22 ; Module3.22 125.476,7.383 125.525,7.334 R9.1 139.033,7.334 141.859,10.16 R10.2 142.684,12.16 144.272,13.747 144.272,41.91 143.383,42.799 C19.2@136.85,42.799 ; C19.2@136.85,42.799 C20.2
  Top Layer w1: v2(1.905,36.703) 1.905,38.735 2.921,39.751 REG1.2@7.747,39.751 ; LED2.1 5.777,32.244 7.747,34.214 REG1.2@7.747,39.751 ; R13.1 31.3,20.577 35.684,20.577 ; v2(46.99,86.36) 46.99,86.487 40.132,79.629 40.132,62.484 29.422,51.774 29.422,40.744 ; 57.531,22.325 55.783,20.577 C8.2 ; Module1.1@67.046,8.067 Module1.1@67.046,8.001 ; Module1.1@75.946,8.067 75.946,2.667 67.046,2.667 Module1.1@67.046,8.001 ; REG1.2@7.747,39.751 18.085,39.751 19.837,39.751 19.84,39.748 C25.2 22.987,39.748 23.041,39.694 C24.2 28.372,39.694 29.422,40.744 ; 29.422,40.744 33.401,40.744 33.401,34.544 33.401,22.86 35.684,20.577 ; 35.684,20.577 C8.2 ; C8.2 50.514,14.383 56.896,8.001 Module1.1@67.046,8.001
  Bottom Layer w0.508: 3.302,57.023 2.032,55.753 2.032,43.307 REG2.2@10.16,35.179 ; v1(50.765,28.818) 50.765,31.812 ; C2.2 52.413,38.103 C5.2 50.765,38.51 51.168,38.107 51.168,34.376 50.765,33.972 C4.2 50.765,31.812 ; v1(62.84,53.467) 78.848,53.467 Debug4.1 88.719,56.334 89.535,57.15 89.535,67.621 C14.2 87.859,69.774 88.57,70.764 ; v1(67.691,30.937) 96.952,30.937 ; v1(68.301,39.367) 69.053,40.119 ; C11.1 69.053,37.668 ; C12.1 69.053,40.119 ; C15.2 88.57,70.764 ; Debug2.1 108.737,70.764 88.57,70.764 ; Module4.10 149.022,11.447 149.039,11.43 R11.2 150.717,14.732 150.749,14.764 C17.2 151.943,18.104 152.172,17.875 C18.1 154.451,17.875 155.321,18.745 155.321,29.362 152.171,32.512 147.193,32.512 144.907,30.226 141.478,30.226 135.458,36.246 v1(135.458,40.64) Debug1.1 120.98,37.668 107.645,37.668 ; 50.765,31.812 52.1,30.477 C3.2 C1.2 58.642,32.004 58.391,32.255 C6.2 58.391,34.617 59.817,36.043 62.001,36.043 64.465,33.579 94.31,33.579 96.952,30.937 ; 69.053,37.668 107.645,37.668 ; 69.053,37.668 69.053,40.119 ; 96.952,30.937 Debug5.1 107.645,37.668
  Bottom Layer w1: v2(1.905,36.703) 1.905,35.56 2.286,35.179 REG2.2@7.874,35.179 ; H2.OUT 14.631,3.784 15.491,2.924 C23.1 19.812,2.924 20.676,3.788 20.676,4.515 C21.2 22.987,4.515 24.673,6.201 C22.2 25.8,11.43 D2.A 28.306,15.78 28.27,15.744 R13.1 18.843,23.368 6.822,23.368 H1.R 4.064,22.744 4.064,27.254 5.467,28.657 P3.2 8.052,35.001 REG2.2@7.874,35.179 ; C26.2 23.168,35.236 23.114,35.182 C27.1 19.967,35.182 19.964,35.179 18.212,35.179 10.16,35.179 REG2.2@7.874,35.179 ; v2(46.99,86.36) 84.967,86.36 ; Module2.8 84.967,86.36 ; Module6.4@126.99,83.566 Debug2.1 110.49,83.566 100.377,93.679 BATT1.NEG 92.286,93.679 84.967,86.36
GPS_1PPS: IC1.17 Module2.6 | length 84
  Top Layer w0.2: IC1.17 v1@52.28,32.29
  Top Layer w0.508: v1@52.28,32.29 v1(52.324,32.334) ; v1(73.05,34.671) 86.741,48.362 86.741,77.747 v1(84.48,80.008)
  Bottom Layer w0.508: v1(52.324,32.334) 56.794,36.805 62.357,36.805 64.491,34.671 v1(73.05,34.671) ; Module2.6 v1(84.48,80.008)
GPS_NMEA_RX: J1.2 Module2.7 | length 109.9
  Bottom Layer w0.508: J1.2 42.51,56.334 41.694,57.15 29.777,57.15 29.142,57.785 29.142,63.635 48.055,82.548 Module2.7
GPS_NMEA_TX: J1.8 Module2.1 | length 12.4
  Bottom Layer w0.508: J1.8 75.238,71.551 Module2.1
GPS_TSIP_RX: J1.4 Module2.5 | length 24.9
  Bottom Layer w0.508: J1.4 72.39,61.722 72.39,73.783 Module2.5
GPS_TSIP_TX: J1.6 Module2.3 | length 18.5
  Bottom Layer w0.508: J1.6 73.965,62.687 73.965,72.818 Module2.3
ICSP_MCLR: "Header 1.1" R3.2 | length 5.2
  Bottom Layer w0.508: 3.302,62.103 R3.2
ICSP_PGC: IC1.24 R6.2 | length 58.5
  Top Layer w0.2: 43.815,29.21 44.235,28.79 IC1.24
  Top Layer w0.254: 42.291,29.21 43.815,29.21
  Top Layer w0.508: v1(35.916,43.383) 35.916,30.505 37.211,29.21 42.291,29.21
  Bottom Layer w0.508: R6.2 32.639,51.943 35.916,48.666 v1(35.916,43.383)
ICSP_PGD: IC1.25 R5.2 | length 63
  Top Layer w0.2: 43.815,28.29 IC1.25
  Top Layer w0.254: 36.703,28.321 36.734,28.29 43.815,28.29
  Top Layer w0.508: v1(34.798,53.035) 34.798,29.337 35.814,28.321 36.703,28.321
  Bottom Layer w0.508: R5.2 33.35,54.483 v1(34.798,53.035)
MCLR: IC1.13 R2.1 R3.1 S1.2 | length 61.9
  Top Layer w0.2: 43.053,34.29 IC1.13
  Top Layer w0.508: v1(37.101,56.083) 37.101,40.744 37.101,34.544 42.799,34.544 43.053,34.29
  Bottom Layer w0.508: R3.1 R2.1 24.689,59.563 28.169,56.083 v1(37.101,56.083)
NetBATT1_POS: BATT1.POS Module2.4 | length 16.7
  Bottom Layer w1: Module2.4 91.95,77.468 BATT1.POS
NetC7_1: C7.1 IC1.85 | length 2.5
  Top Layer w0.2: C7.1@56.058,44.266 56.058,43.358 56.078,43.338 IC1.85
  Top Layer w0.508: C7.1@56.058,44.266 C7.1
NetC8_1: C8.1 IC1.30 R1.1 | length 5
  Top Layer w0.2: C8.1@50.546,24.127 50.546,25.883 50.578,25.915 IC1.30
  Top Layer w0.508: C8.1 50.546,24.127 51.689,24.127 51.692,24.13 R1.1
NetC20_1: C20.1 IC2.2 | length 3
  Top Layer w0.4: IC2.2 132.842,44.47
  Top Layer w0.508: 132.842,44.47 133.159,44.787 C20.1
NetD1_0: D1.A H1.L | length 7.2
  Bottom Layer w1: H1.L 7.036,16.677 9.409,19.05 D1.A
NetD3_0: D3.A H2.IN | length 6.7
  Bottom Layer w1: H2.IN 11.342,8.552 D3.A
"NetHeader 1_4": "Header 1.4" R5.1 | length 3.1
  Bottom Layer w0.508: 3.302,54.483 R5.1
"NetHeader 1_5": "Header 1.5" R6.1 | length 3.1
  Bottom Layer w0.508: 3.302,51.943 R6.1
NetLED1_1: LED1.2 Module3.24 P1.1 | length 21.7
  Top Layer w0.508: Module3.24 124.409,10.383 v1(124.663,10.637) ; LED1.2 139.457,11.557 v1(140.589,11.557)
  Bottom Layer w0.508: v1(124.663,10.637) 126.472,12.446 P1.1 135.382,10.668 139.446,10.668 139.457,10.679 139.711,10.679 v1(140.589,11.557)
NetLED1_2: LED1.1 P1.2 R10.1 | length 10.9
  Top Layer w0.254: LED1.1 v1(139.457,17.145)
  Top Layer w0.508: LED1.1 140.64,14.504 140.646,14.51 R10.1
  Bottom Layer w0.254: P1.2 135.382,16.51 136.017,17.145 v1(139.457,17.145)
NetLED2_1: LED2.2 P3.1 R14.2 | length 7.8
  Top Layer w1: LED2.2 v1(5.777,26.924)
  Bottom Layer w1: v1(5.777,26.924) 7.245,26.924 P3.1 9.754,26.117 9.868,26.003 R14.2
NetModule1_4: Module1.5 R4.1 R4.2 | length 8
  Top Layer w0.4: R4.2 R4.1 ; Module1.5 69.896,11.049
  Top Layer w0.508: R4.1 67.035,13.335 67.61,13.335 69.896,11.049
NetModule3_3: Module3.11 R8.2 | length 5.1
  Top Layer w0.508: R8.2 107.239,11.208 108.064,10.383 Module3.11
NetModule3_9: Module3.26 R9.2 S2.2 | length 14.1
  Top Layer w0.508: Module3.26 125.044,13.383 125.958,12.469 S2.2@127.872,12.469 ; S2.2@127.872,18.669 S2.2@127.872,12.469 ; R9.2 127.889,11.049 127.872,11.066 S2.2@127.872,12.469
NetP2_2: P2.2 R11.1 | length 17.3
  Bottom Layer w0.508: R11.1 157.988,11.43 P2.2
OSC1: C9.2 IC1.63 X1.2 | length 11.7
  Top Layer w0.2: IC1.63 63.881,34.29 64.77,33.401 65.151,33.401
  Top Layer w0.508: 65.151,33.401 65.154,33.398 C9.2 70.072,33.398 X1.2
OSC2: C10.2 IC1.64 X1.1 | length 11.6
  Top Layer w0.2: IC1.64 63.997,34.79
  Top Layer w0.254: 63.997,34.79 65.024,35.817
  Top Layer w0.508: 65.024,35.817 C10.2 70.072,35.817 X1.1
PIC_SPI1_SCLK: Debug1.4 IC1.70 IC2.8 Module5.5 | length 121.1
  Top Layer w0.2: IC1.70 63.556,37.79 v1(63.627,37.719)
  Top Layer w0.3: IC2.8 130.215,43.22 130.505,43.51 v1(130.505,48.387)
  Top Layer w0.508: v1(155.702,47.879) 157.455,47.879 157.531,47.955 158.793,47.963 Module5.5
  Bottom Layer w0.508: v1(63.627,37.719) 60.249,37.719 59.868,38.1 59.868,39.446 62.027,41.605 62.027,44.12 65.405,47.498 121.793,47.498 122.555,48.26 Debug1.4 124.295,47.917 129.197,47.917 129.667,48.387 v1(130.505,48.387) 131.318,48.387 131.953,47.752 153.797,47.752 153.924,47.879 v1(155.702,47.879)
PIC_SPI1_SDI: Debug1.3 IC1.9 IC2.6 Module5.7 | length 172.1
  Top Layer w0.2: v1(45.695,36.29) IC1.9
  Top Layer w0.44: v1(126.822,45.72) IC2.6
  Top Layer w0.508: v1@159.537,45.72 v1(159.604,45.72) 159.647,45.763 Module5.7
  Bottom Layer w0.508: v1(45.695,36.29) 44.196,37.789 44.196,42.19 53.416,51.41 156.718,51.41 159.537,48.59 v1@159.537,45.72 ; Debug1.3 v1(126.822,45.72) v1@159.537,45.72 ; v1(159.604,45.72) v1@159.537,45.72
PIC_SPI1_SDO: Debug1.2 IC1.72 IC2.7 Module5.3 | length 119
  Top Layer w0.2: v1(60.731,38.79) IC1.72
  Top Layer w0.44: v1(127.406,43.18) 128.696,44.47 IC2.7
  Top Layer w0.508: Module5.3 v1(163.652,50.163)
  Bottom Layer w0.508: v1(60.731,38.79) 63.032,41.091 63.032,42.763 65.989,45.72 121.412,45.72 Debug1.2 v1(127.406,43.18) 161.9,43.18 163.17,44.45 163.17,49.68 v1(163.652,50.163)
PIC_SPI2_SCLK: Debug2.4 IC1.10 Module6.7 | length 150.8
  Top Layer w0.2: IC1.10 48.714,35.79
  Top Layer w0.508: 48.714,35.79 v1(49.351,35.154) ; v1(118.999,63.405) 118.999,78.486 115.951,81.534 115.951,91.567 119.031,94.647 v1(121.539,94.647)
  Bottom Layer w0.508: v1(49.351,35.154) 45.212,35.154 43.18,37.186 43.18,43.028 52.705,52.553 108.105,52.553 Module6.7 ; Debug2.4 v1(121.539,94.647)
PIC_SPI2_SDI: Debug2.3 IC1.11 Module6.1 RA1.1 | length 159.7
  Top Layer w0.2: 44.949,35.29 IC1.11
  Top Layer w0.254: 44.044,36.195 44.949,35.29
  Top Layer w0.508: 44.044,36.195 44.044,76.937 v1(56.007,88.9)
  Bottom Layer w0.508: v1(56.007,88.9) 78.537,88.9 85.344,95.707 114.478,95.707 Debug2.3 127.054,94.161 Module6.1 129.034,95.502 133.731,90.805 133.731,81.158 RA1.1
PIC_SPI2_SDO: Debug2.2 IC1.12 Module6.2 | length 160.7
  Top Layer w0.2: 43.823,34.79 IC1.12
  Top Layer w0.254: v1@42.164,36.449 43.823,34.79 ; 58.928,92.837 65.49,99.399 127.931,99.399 129.413,97.917 129.413,94.996 130.556,93.853 v1(130.556,91.567)
  Top Layer w0.508: v1@48.006,51.943 48.006,70.485 58.928,81.407 58.928,92.837
  Bottom Layer w0.254: Module6.2@127.119,91.567 v1(130.556,91.567)
  Bottom Layer w0.508: v1(42.175,36.449) 42.175,46.101 v1(48.017,51.943) ; Debug2.2 125.73,90.297 125.849,90.297 Module6.2
PIC_UART1_/CTS: IC1.47 Module4.16 | length 147.1
  Top Layer w0.2: 59.078,25.601 IC1.47
  Top Layer w0.254: v1@59.078,18.288 59.078,25.601
  Bottom Layer w0.508: v1(59.106,18.288) 66.243,18.288 74.905,9.627 146.189,9.627 154.419,1.397 167.513,1.397 168.021,1.905 168.021,3.404 165.176,6.248 165.176,17.254 Module4.16
PIC_UART1_/RTS: IC1.48 Module4.12 | length 141.2
  Top Layer w0.2: IC1.48 59.578,24.547 60.249,23.876
  Top Layer w0.254: 60.249,23.266 60.249,23.876
  Top Layer w0.508: v1(60.249,15.443) 60.249,23.266
  Bottom Layer w0.508: v1(60.249,15.443) 67.132,15.443 81.382,1.194 145.631,1.194 146.189,0.635 170.307,0.635 170.561,0.889 170.561,12.255 Module4.12
PIC_UART1_RX: Debug3.2 IC1.52 Module4.2 | length 94.4
  Top Layer w0.2: IC1.52 62.992,28.79 63.28,28.502 63.28,27.373 64.148,26.505
  Top Layer w0.508: v1(64.148,21.488) 64.148,26.505
  Bottom Layer w0.508: v1(64.148,21.488) 135.661,21.488 Debug3.2 144.475,27.432 144.49,27.447 Module4.2
PIC_UART1_TX: Debug3.3 IC1.53 Module4.3 | length 99.2
  Top Layer w0.2: IC1.53 61.087,29.29 60.706,28.909 60.706,27.991 63.386,25.311
  Top Layer w0.508: v1(61.976,20.828) 61.976,23.406 63.386,24.816 63.386,25.311
  Bottom Layer w0.508: v1(61.976,20.828) 62.611,20.193 136.906,20.193 Debug3.3 142.16,25.447 Module4.3
PIC_UART2_RX: Debug4.3 IC1.49 J1.5 J1.7 | length 65.6
  Top Layer w0.2: IC1.49 60.078,25.444 60.63,24.892
  Top Layer w0.508: 60.63,24.892 61.011,24.511 61.592,24.511 v1(61.805,24.724) ; v1(72.034,24.892) 72.034,37.998 85.471,51.435 85.471,60.706 v1(84.836,61.341)
  Bottom Layer w0.508: v1(61.805,24.724) 71.867,24.724 v1(72.034,24.892) ; J1.7 J1.5 Debug4.3 v1@84.763,61.414
PIC_UART2_TX: Debug4.2 IC1.50 J1.1 J1.3 | length 85
  Top Layer w0.2: IC1.50 61.011,26.765 61.011,25.933 v1(61.214,25.73)
  Top Layer w0.508: v1(82.372,24.232) 82.372,36.093 95.885,49.606 95.885,56.261 93.345,58.801 v1(88.011,58.801)
  Bottom Layer w0.508: v1(61.214,25.73) 61.112,25.832 61.112,25.235 60.954,25.077 60.954,23.742 61.29,23.406 81.547,23.406 v1(82.372,24.232) ; J1.1 J1.3 Debug4.2 v1@87.938,58.874
PS2_ACK: IC1.92 Module6.9 RA1.4 | length 120.6
  Top Layer w0.2: IC1.92 52.578,47.295
  Top Layer w0.508: 52.578,47.295 62.535,57.252 70.917,57.252 73.787,54.381 v1@83.439,54.381
  Bottom Layer w0.508: v1(83.439,54.356) 95.377,54.356 107.823,66.802 112.141,66.802 122.809,77.47 129.159,77.47 131.953,74.676 133.731,74.676 ; Module6.9 133.731,70.179 133.731,74.676 ; RA1.4 133.731,78.608 133.731,74.676
PS2_ATT: IC1.28 Module6.6 | length 115.3
  Top Layer w0.2: 49.149,22.352 49.149,25.527 49.578,25.527 IC1.28
  Top Layer w0.508: 49.149,22.352 v1(50.622,22.352) ; v1(84.734,23.317) 86.233,24.816 86.233,35.839 99.06,48.666 99.06,55.372 v1(101.981,58.293)
  Bottom Layer w0.508: v1(50.622,22.352) 50.775,22.2 61.151,22.2 61.595,22.644 84.061,22.644 v1(84.734,23.317) ; v1(101.981,58.293) 108.915,65.227 116.779,65.227 Module6.6
SOSCI: C11.2 IC1.73 X2.1 | length 7.3
  Top Layer w0.2: IC1.73 v1(63.703,39.29)
  Bottom Layer w0.508: v1(63.703,39.29) 65.554,37.44 ; X2.1 65.659,37.545 65.554,37.44 ; 65.554,37.44 65.503,37.389 C11.2 65.554,37.44
SOSCO: C12.2 IC1.74 X2.2 | length 6.2
  Top Layer w0.2: IC1.74 62.955,39.79 v1(63.662,40.497)
  Bottom Layer w0.508: v1(63.662,40.497) X2.2 65.659,41.554 65.503,41.71 C12.2
SYS: C21.1 C22.1 C23.2 C25.1 C27.2 D1.K D3.K R12.2 REG1.1 REG2.1 | length 56.5
  Top Layer w1: v2(16.129,37.338) REG1.1 19.279,37.338 20.419,36.198 C25.1 21.869,36.198 21.869,31.42 24.511,28.778 24.511,17.598 R12.2
  Bottom Layer w1: v2(16.129,37.338) 16.383,37.592 REG2.1 19.558,37.592 20.025,38.059 20.025,38.073 20.684,38.732 C27.2 ; D1.K 21.784,15.744 ; C21.1 19.872,6.915 19.431,6.474 C23.2 18.466,8.941 18.478,8.953 D3.K C22.1@22.2,11.43 ; R12.2 21.784,15.744 ; C22.1 C22.1@22.2,11.43 ; 21.784,15.744 22.2,15.328 C22.1@22.2,11.43
SYSPOWMONITOR: D2.K IC1.23 R12.1 R13.2 | length 35.6
  Top Layer w0.2: 43.561,30.48 44.751,29.29 IC1.23
  Top Layer w0.508: v1(38.862,30.48) 43.561,30.48
  Bottom Layer w0.508: R13.2 29.003,30.48 v1(38.862,30.48)
  Bottom Layer w1: R12.1 R13.2 26.467,23.463 D2.K
USB_PIC_N: IC1.56 Module1.4 | length 27.5
  Top Layer w0.2: IC1.56 64.111,30.79
  Top Layer w0.254: 64.111,30.79 64.65,30.251 64.65,28.727
  Top Layer w0.4: Module1.4 70.696,21.303
  Top Layer w0.508: 64.65,28.727 66.307,27.071 66.307,25.692 70.696,21.303
USB_PIC_P: IC1.57 Module1.3 | length 30.7
  Top Layer w0.2: v1(60.731,31.29) IC1.57
  Top Layer w0.4: Module1.3 71.496,22.08
  Top Layer w0.508: v1(67.069,27.762) 67.069,26.507 71.496,22.08
  Bottom Layer w0.508: v1(60.731,31.29) 64.259,27.762 v1(67.069,27.762)
USD_/CS: IC1.91 Module5.2 | length 138.2
  Top Layer w0.2: IC1.91 53.078,42.951 53.975,43.848
  Top Layer w0.508: 53.975,43.848 53.975,46.761 61.544,54.331 64.897,54.331 68.936,50.292 v1(68.936,44.247) ; Module5.2 163.957,51.263 164.77,50.45 v1(164.77,49.809)
  Bottom Layer w0.508: v1(68.936,44.247) 119.304,44.247 121.641,41.91 162.992,41.91 164.77,43.688 v1(164.77,49.809)
VBUS: IC1.54 R4.7 | length 25.4
  Top Layer w0.2: IC1.54 62.992,29.79 63.888,28.894
  Top Layer w0.4: v1(65.583,10.592) 66.16,11.169 R4.7
  Top Layer w0.508: v1(62.078,14.097) 65.545,17.564 65.545,26.302 63.888,27.959 63.888,28.894
  Bottom Layer w0.508: v1(62.078,14.097) v1(65.583,10.592)
XBEE_/DTR: IC1.58 Module4.9 | length 97.3
  Top Layer w0.2: IC1.58 63.236,31.79 63.465,31.561 64.297,31.561 64.526,31.79 68.206,31.79
  Top Layer w0.508: 68.206,31.79 68.564,31.432 68.564,26.543 v1(78.775,16.332)
  Bottom Layer w0.508: v1(78.775,16.332) 95.202,16.332 96.904,18.034 142.782,18.034 Module4.9
XBEE_/RESET: IC1.59 Module4.5 | length 98
  Top Layer w0.2: IC1.59 v1@64.008,32.29 ; v1@63.754,32.258 v1(64.008,32.258)
  Top Layer w0.508: v1(83.236,29.997) 83.744,29.489 v1(83.744,19.126)
  Bottom Layer w0.508: v1(64.008,32.258) 64.643,32.258 66.904,29.997 v1(83.236,29.997) ; v1(83.744,19.126) 145.048,19.126 Module4.5
XBEE_ASSOCIATE: IC1.38 Module4.15 P2.1 | length 150.5
  Top Layer w0.2: v1(54.578,25.451) IC1.38
  Top Layer w0.508: v1(157.429,10.185) 159.766,12.522 v1(166.167,12.522)
  Bottom Layer w0.508: v1(54.578,25.451) 52.349,25.451 49.759,22.86 49.759,21.59 52.108,19.24 69.329,19.24 73.381,15.189 132.131,15.189 133.604,13.716 142.138,13.716 145.466,10.389 146.939,10.389 147.142,10.185 v1(157.429,10.185) ; v1(166.167,12.522) 167.132,11.557 ; P2.1 169.291,7.003 169.291,9.398 167.132,11.557 ; Module4.15 167.132,17.21 167.132,11.557
pads on no net: "Header 1.6" H2.NC IC1.1 IC1.3 IC1.4 IC1.5 IC1.6 IC1.7 IC1.8 IC1.14 IC1.18 IC1.19 IC1.20 IC1.21 IC1.22 IC1.26 IC1.27 IC1.29 IC1.32 IC1.33 IC1.34 IC1.35 IC1.41 IC1.42 IC1.43 IC1.44 IC1.51 IC1.66 IC1.67 IC1.68 IC1.69 IC1.71 IC1.76 IC1.77 IC1.78 IC1.79 IC1.80 IC1.81 IC1.82 IC1.83 IC1.84 IC1.87 IC1.88 IC1.89 IC1.90 IC1.93 IC1.94 IC1.95 IC1.96 IC1.97 IC1.98 IC1.99 IC1.100 LED1.3 LED1.4 LED2.3 LED2.4 Module1.2 Module1.NC Module2.NC Module3.3 Module3.4 Module3.5 Module3.6 Module3.7 Module3.8 Module3.9 Module3.10 Module3.14 Module3.15 Module3.16 Module3.17 Module3.18 Module3.19 Module3.20 Module3.23 Module3.25 Module3.27 Module3.28 Module3.29 Module3.30 Module3.31 Module3.32 Module3.33 Module3.34 Module4.4 Module4.6 Module4.7 Module4.8 Module4.11 Module4.13 Module4.14 Module4.17 Module4.18 Module4.19 Module4.20 Module5.1 Module5.8 Module5.SHLD Module6.3 Module6.8 Module6.NC R4.3 R4.4 R4.5 R4.6 RA1.2 RA1.3 X2.NC

## Polygon pours and split planes (outlines as drawn)
no net on Top Layer "Connector Keepout" (solid, pour order 2): 1.143,64.262 5.334,64.262 5.334,47.879 1.143,47.879
no net on Top Layer "Connector Keepout" (solid, pour order 4): 25.527,12.954 21.565,12.954 21.26,12.7 21.26,10.075 21.768,9.652 25.832,9.652 26.34,10.075 26.34,12.531 25.832,12.954
no net on Top Layer "Connector Keepout" (solid, pour order 6): 97.536,30.353 97.663,30.226 100.203,30.226 100.203,22.606 97.663,22.606
no net on Top Layer "Connector Keepout" (solid, pour order 8): 134.112,16.256 136.652,16.256 136.652,11.176 134.112,11.176
no net on Top Layer "Connector Keepout" (solid, pour order 10): 140.335,31.242 142.875,31.242 142.875,23.622 140.335,23.622
no net on Top Layer "Connector Keepout" (solid, pour order 12): 165.481,3.937 170.561,3.937 170.561,1.397 165.481,1.397
no net on Top Layer "Connector Keepout" (solid, pour order 14): 122.682,49.53 125.222,49.53 125.222,39.37 122.682,39.37
no net on Top Layer "Connector Keepout" (solid, pour order 16): 122.809,92.456 120.269,92.456 120.269,82.296 122.809,82.296
no net on Top Layer "Connector Keepout" (solid, pour order 18): 125.222,97.409 128.778,97.409 128.778,61.722 125.321,61.722
no net on Top Layer "Connector Keepout" (solid, pour order 20): 93.599,96.139 98.298,96.139 98.425,96.012 98.425,71.12 93.853,71.12 93.599,70.866 93.472,70.993 93.472,75.311 93.472,75.565 94.869,76.962 94.742,77.089 94.742,79.248 93.853,79.248 93.091,80.01
no net on Top Layer "Connector Keepout" (solid, pour order 22): 76.835,84.074 76.957,83.964 82.677,83.964 82.677,73.626 82.434,73.406 77.2,73.406
no net on Top Layer "Connector Keepout" (solid, pour order 24): 80.391,62.738 83.058,62.738 83.058,54.991 80.518,54.991 80.391,54.864
no net on Top Layer "Connector Keepout" (solid, pour order 26): 79.121,65.278 73.787,65.278 73.787,55.118 73.914,54.991 79.121,54.991
no net on Top Layer "Connector Keepout" (solid, pour order 28): 6.846,29.953 9.386,29.953 9.386,24.873 6.846,24.873

## Keep-outs
Keep-Out Layer:
  the board outline again, w0.254

## Silkscreen, mask and mechanical layers (free items; w line width, h text height)
Top Overlay:
  text "NMEA_TX" at 62.919,63.065 h1.52
  text "TSIP_TX" at 62.919,60.567 h1.52
  text "TSIP_RX" at 62.919,58.07 h1.52
  text "NMEA_RX" at 62.919,55.572 h1.52

## Text inside footprints (layer, text, board x,y; h text height)
C22: Top Overlay "+" at 19.698,10.68 h1.5